# Altium PCB 56PCB原始.pcbdoc (part 1 of 3)
Units mm, origin at the board's own origin, x right, y up, seen from the top; angles counter-clockwise.
Board outline 101.98 x 99.56 mm, 2 copper layers (Top Layer, Bottom Layer); 160 components, 0 nets, 663 pads, 274 vias.
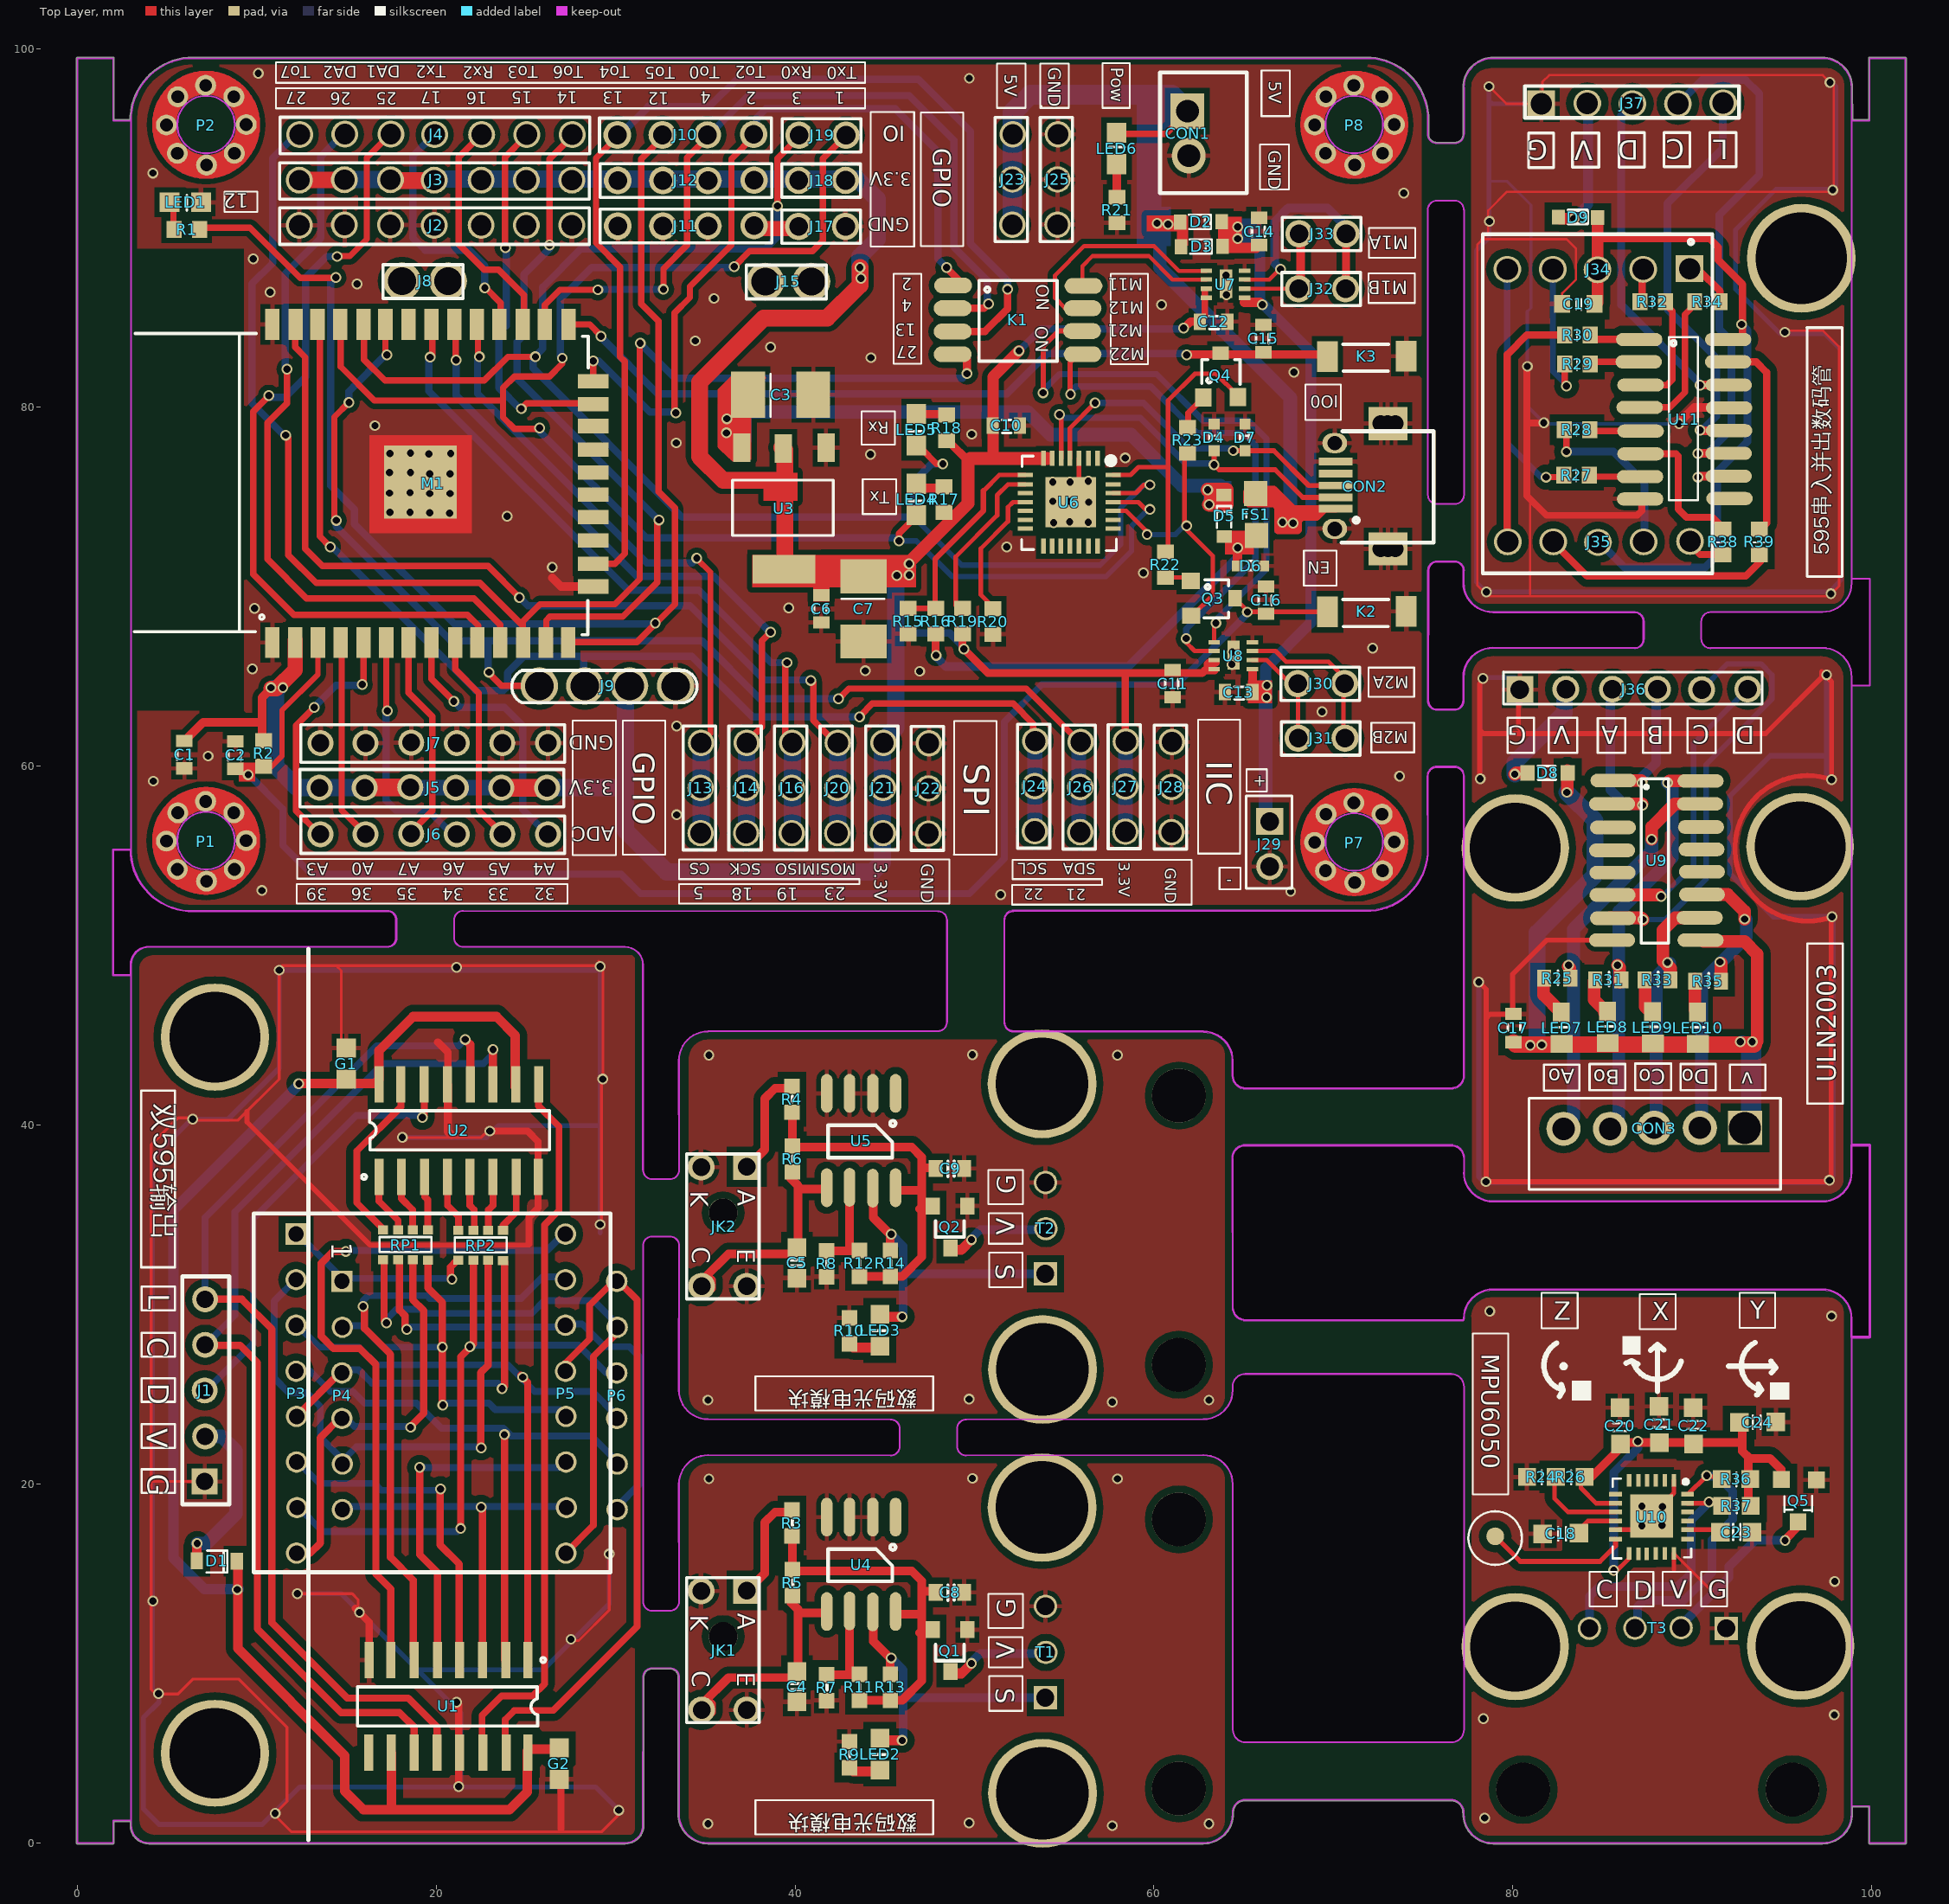
[diagram p0: Top Layer view]
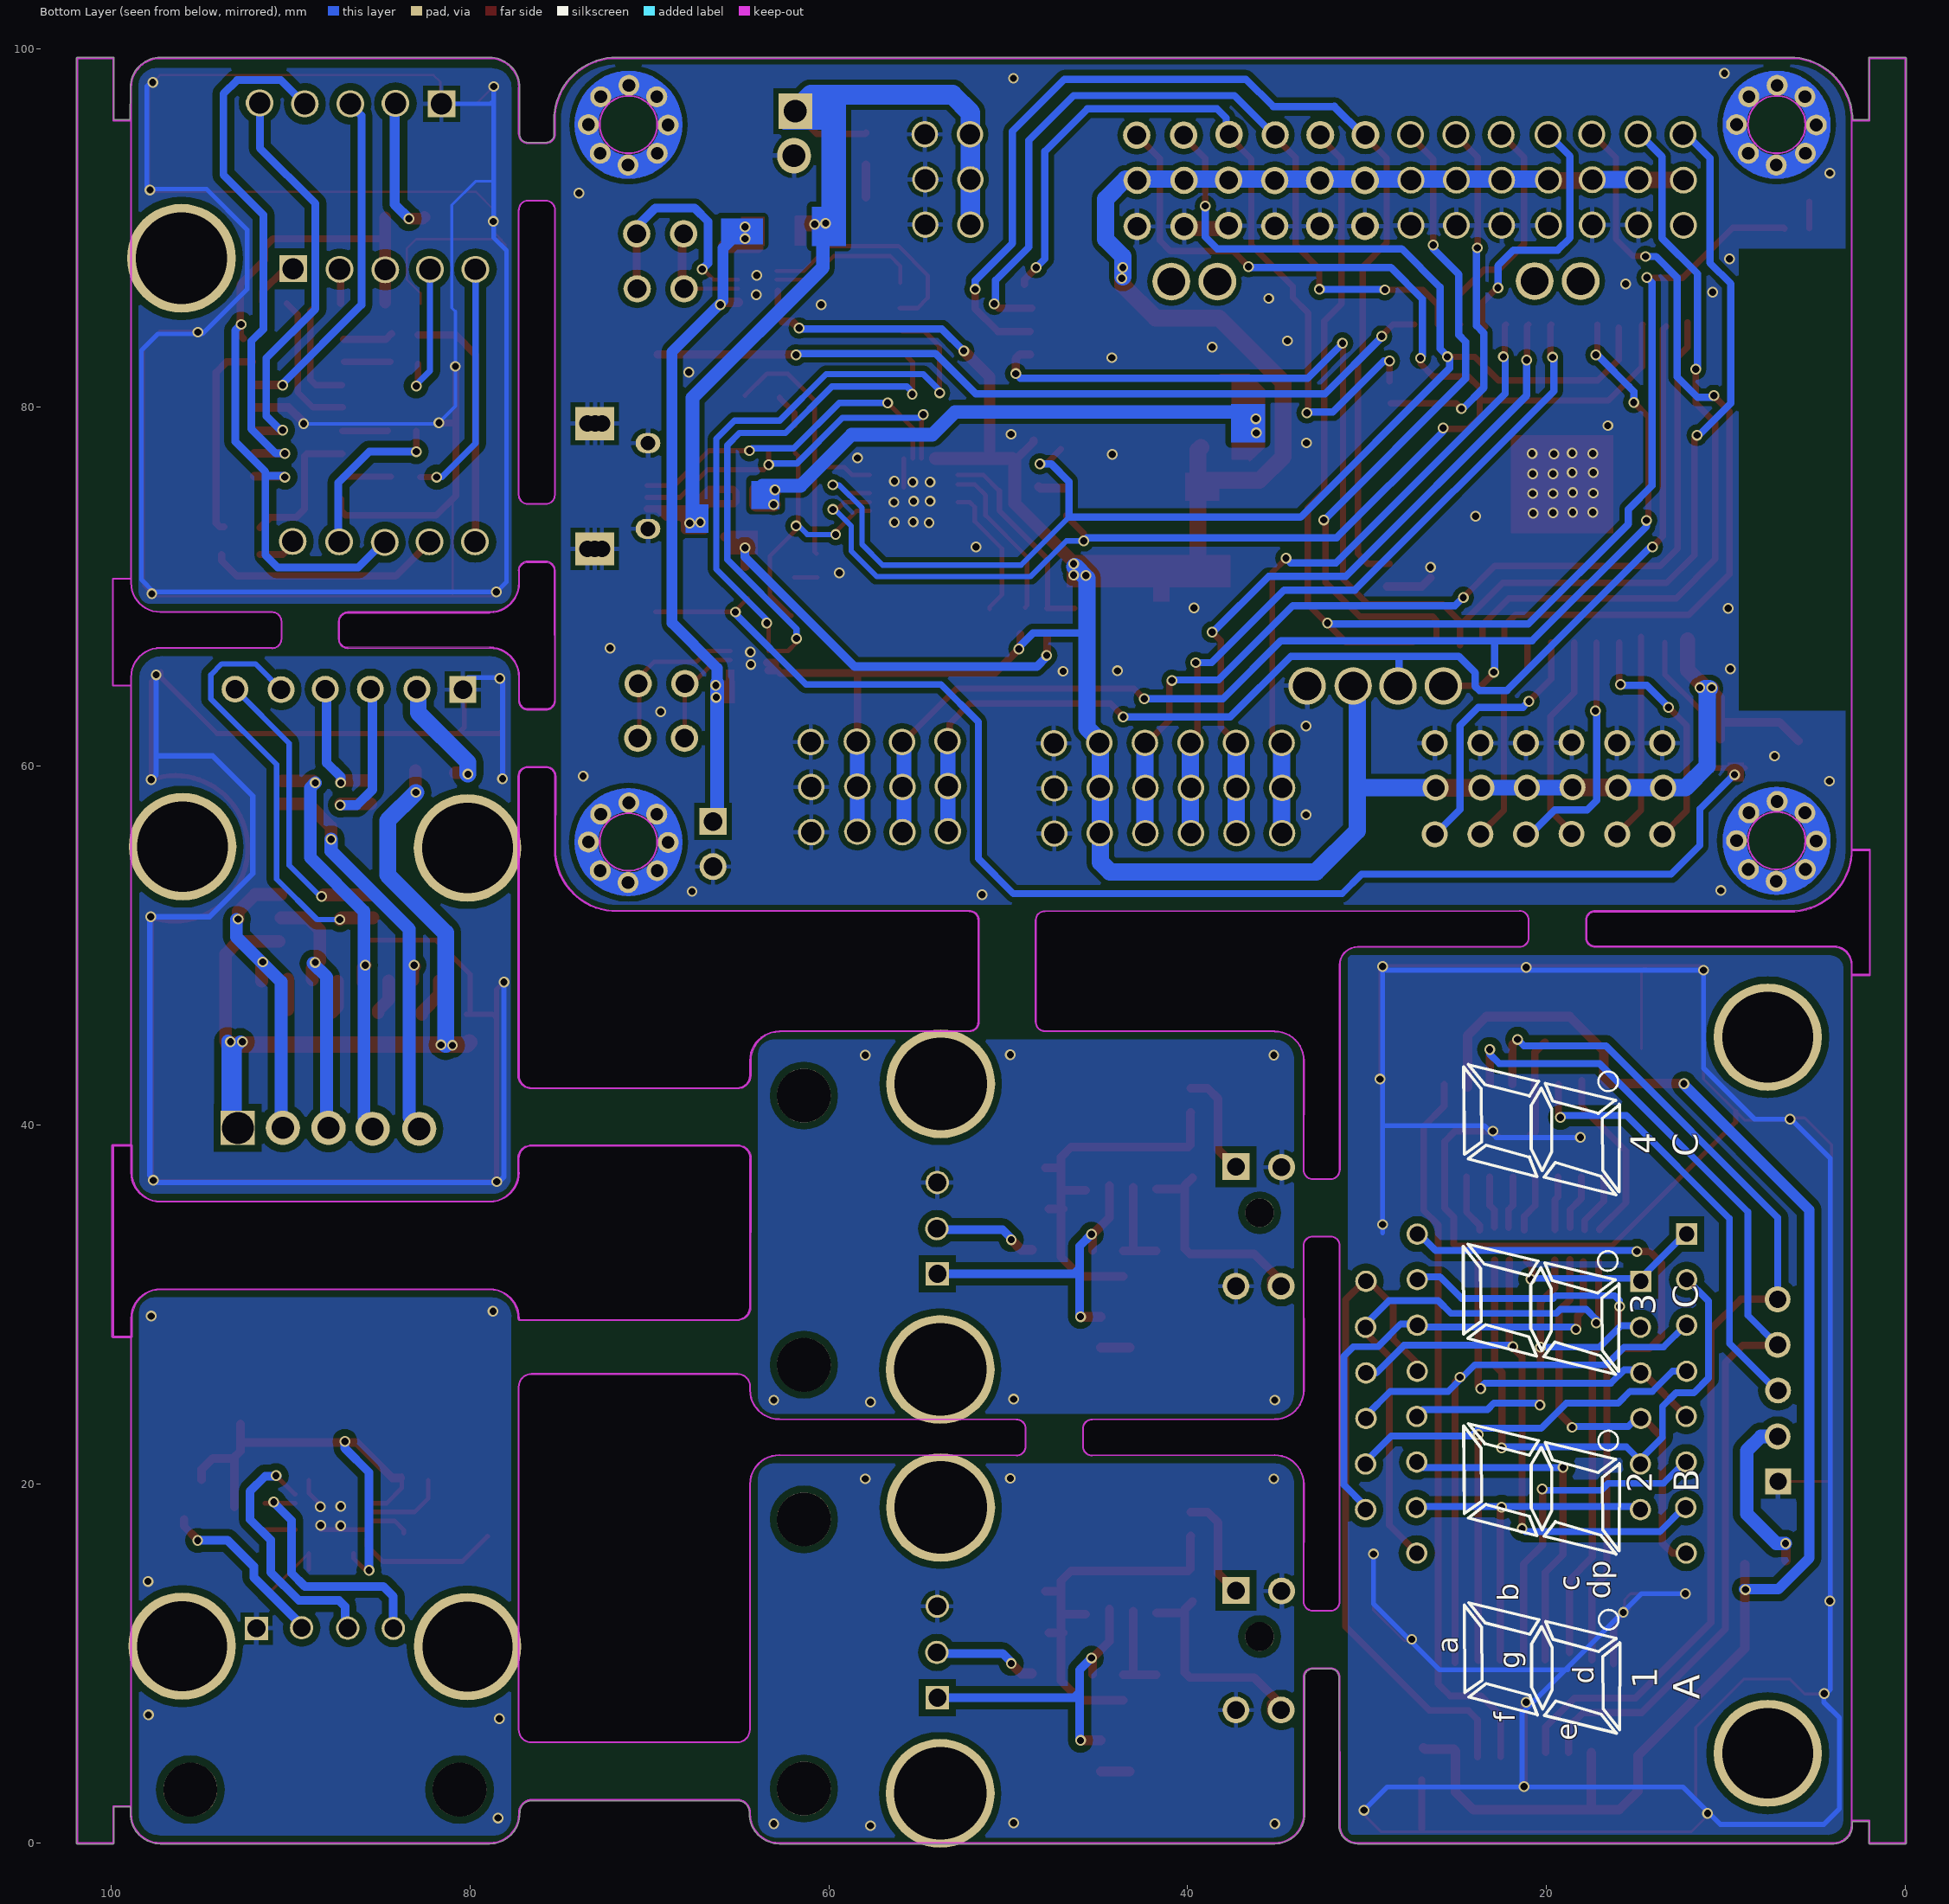
[diagram p1: Bottom Layer view, seen from below]

## Layer stack, top to bottom
Top Solder: solder mask 0.0102, Solder Resist, Dk 3.5
Top Layer: signal copper 0.0356
Dielectric 1: dielectric 0.32, FR-4, Dk 4.8
Bottom Layer: signal copper 0.0356
Bottom Solder: solder mask 0.0102, Solder Resist, Dk 3.5

## Board outline
3.989,-0.05 ccw(c3.991,0.991) 3.991,-0.05 ccw(c3.991,0) 3.991,-0.05 30.533,-0.05 30.534,-0.05 ccw(c30.534,0) 30.534,-0.05 ccw(c30.534,0.991) 31.465,0.525 ccw(c30.534,0.991) 31.575,0.99 ccw(c31.524,0.991) 31.575,0.991 31.58,9.24 ccw(c31.53,9.24) 31.58,9.24 cw(c32.038,9.24) 32.038,9.697 33.028,9.697 cw(c33.028,9.24) 33.486,9.24 cw(c33.028,9.24) 33.486,9.24 33.474,1.626 ccw(c33.524,1.626) 33.474,1.625 cw(c35.15,1.626) 33.474,1.626 33.474,1.625 ccw(c35.15,1.626) 35.15,-0.05 62.76,-0.05 ccw(c62.76,1.626) 64.436,1.625 ccw(c64.385,1.626) 64.436,1.626 cw(c62.76,1.626) 64.436,1.625 64.436,1.626 ccw(c64.385,1.626) 64.435,1.629 64.431,1.699 cw(c65.092,1.697) 65.092,2.358 76.547,2.358 cw(c76.547,1.697) 77.208,1.697 ccw(c77.258,1.697) 77.208,1.694 77.213,1.624 ccw(c78.889,1.626) 78.889,-0.05 97.253,-0.05 ccw(c97.253,0) 97.253,-0.05 ccw(c97.253,1.626) 98.929,1.626 98.929,2.007 99.828,2.007 99.828,0 ccw(c99.878,0) 99.878,-0.05 101.878,-0.05 ccw(c101.878,0) 101.929,0 101.929,99.46 ccw(c101.878,99.46) 101.878,99.51 99.878,99.51 ccw(c99.878,99.46) 99.828,99.46 99.828,96.04 98.93,96.04 98.929,97.834 ccw(c97.253,97.834) 97.253,99.51 78.889,99.51 ccw(c78.889,99.46) 78.888,99.51 ccw(c78.889,97.834) 77.213,97.834 ccw(c77.263,97.834) 77.224,97.803 77.224,95.25 ccw(c77.269,95.228) 77.218,95.228 cw(c76.761,95.228) 76.761,94.77 75.77,94.77 cw(c75.77,95.228) 75.312,95.227 75.313,96.285 ccw(c75.263,96.285) 75.313,96.285 ccw(c75.263,96.285) 75.313,96.288 ccw(c71.834,96.031) 72.092,99.51 ccw(c72.088,99.46) 72.088,99.51 6.176,99.51 ccw(c6.175,99.46) 6.171,99.51 ccw(c6.429,96.031) 2.951,96.299 ccw(c2.999,96.285) 2.949,96.285 2.949,96.04 2.05,96.04 2.05,99.46 ccw(c2,99.46) 2,99.51 0,99.51 ccw(c0,99.46) -0.05,99.46 -0.05,0 ccw(c0,0) 0,-0.05 2,-0.05 ccw(c2,0) 2.05,0 2.05,1.197 2.95,1.197 2.95,0.991 ccw(c3,0.991) 2.95,0.991 ccw(c3.991,0.991)
cut-out: 30.534,49.936 cw(c30.534,48.946) 31.524,48.946 31.526,37.51 31.529,37.51 ccw(c32.037,37.51) 32.037,37.002 33.027,37.002 ccw(c33.027,37.51) 33.535,37.51 33.533,37.51 33.524,43.605 cw(c35.15,43.605) 35.15,45.231 47.959,45.248 ccw(c47.959,45.756) 48.467,45.756 48.467,51.42 ccw(c47.959,51.42) 47.959,51.928 21.506,51.94 ccw(c21.506,51.432) 20.998,51.432 20.998,50.442 ccw(c21.506,50.442) 21.506,49.934 21.506,49.936
cut-out: 75.267,75.127 75.263,91.012 cw(c75.771,91.012) 75.771,91.52 76.762,91.52 cw(c76.762,91.012) 77.27,91.012 77.274,91.012 77.274,75.127 cw(c76.766,75.127) 76.766,74.619 75.775,74.619 cw(c75.775,75.127)
cut-out: 90.503,67.091 ccw(c91.011,67.091) 91.011,66.583 91.011,66.586 97.253,66.599 cw(c97.253,64.973) 98.878,64.973 98.878,64.494 99.9,64.494 99.9,70.463 98.878,70.463 98.878,70.224 cw(c97.253,70.224) 97.253,68.599 91.011,68.592 91.011,68.59 ccw(c91.011,68.082) 90.503,68.082
cut-out: 49.033,22.108 ccw(c49.541,22.108) 49.541,21.6 62.76,21.615 cw(c62.76,19.99) 64.385,19.99 64.397,6.319 64.398,6.319 ccw(c65.11,6.319) 65.11,5.608 76.565,5.608 ccw(c76.565,6.319) 77.276,6.319 77.276,25.428 ccw(c76.565,25.428) 76.565,26.139 65.092,26.139 ccw(c65.092,25.428) 64.381,25.428 64.385,25.428 64.385,25.241 cw(c62.76,25.241) 62.76,23.615 49.541,23.606 ccw(c49.541,23.098) 49.033,23.098
cut-out: 31.529,13.456 ccw(c32.037,13.456) 32.037,12.948 33.027,12.948 ccw(c33.027,13.456) 33.535,13.456 33.533,13.456 33.524,19.99 cw(c35.15,19.99) 35.15,21.615 45.325,21.601 45.325,21.598 ccw(c45.325,22.106) 45.833,22.106 45.833,23.097 ccw(c45.325,23.097) 45.325,23.605 45.325,23.607 35.15,23.615 cw(c35.15,25.241) 33.524,25.241 33.536,33.294 ccw(c33.028,33.294) 33.028,33.802 32.038,33.802 ccw(c32.038,33.294) 31.53,33.294 31.526,33.294
cut-out: 65.11,29.1 77.178,29.1 ccw(c77.178,29.235) 77.313,29.235 cw(c78.889,29.235) 78.889,30.811 88.071,30.811 97.253,30.811 cw(c97.253,29.235) 98.828,29.236 ccw(c98.878,29.235) 98.828,29.235 98.828,28.215 ccw(c98.878,28.215) 98.837,28.186 ccw(c98.894,28.215) 98.894,28.151 99.881,28.151 ccw(c99.881,28.215) 99.945,28.215 99.945,38.873 ccw(c99.881,38.873) 99.881,38.936 98.894,38.936 ccw(c98.894,38.873) 98.831,38.862 ccw(c98.881,38.859) 98.831,38.859 98.828,37.363 ccw(c98.878,37.363) 98.828,37.363 ccw(c97.253,37.363) 98.828,37.363 cw(c97.253,37.363) 97.253,35.788 cw(c97.253,37.363) 97.253,35.788 cw(c97.253,35.738) 97.253,35.788 78.889,35.788 cw(c78.889,37.363) 77.314,37.329 ccw(c77.277,37.363) 77.328,37.363 77.328,38.142 ccw(c76.554,38.142) 76.554,38.916 65.084,38.916 ccw(c65.084,38.154) 64.323,38.154 ccw(c64.373,38.154) 64.326,38.136 64.346,29.861 ccw(c64.397,29.861) 64.348,29.849 ccw(c65.11,29.861)
cut-out: 64.335,43.605 cw(c64.385,43.605) 64.335,43.606 cw(c62.76,43.605) 64.335,43.605 64.34,42.776 cw(c65.102,42.777) 64.34,42.777 64.34,42.776 ccw(c65.102,42.777) 65.102,42.015 76.557,42.015 ccw(c76.557,42.777) 77.319,42.777 ccw(c77.269,42.777) 77.319,42.777 77.315,59.449 ccw(c77.265,59.449) 77.315,59.456 ccw(c76.757,59.449) 76.757,60.008 75.766,60.008 ccw(c75.766,59.449) 75.208,59.449 ccw(c75.258,59.449) 75.209,59.437 75.213,55.113 cw(c71.834,55.365) 72.086,51.987 52.175,51.98 cw(c52.175,51.421) 52.175,51.98 ccw(c52.175,51.421) 51.617,51.421 51.617,45.757 ccw(c52.175,45.757) 52.159,45.199 ccw(c52.175,45.246) 52.175,45.196 62.76,45.18 ccw(c62.76,45.231) 62.76,45.18 ccw(c62.76,43.605) 62.76,45.18 cw(c62.76,43.605)
cut-out: 31.474,48.946 cw(c31.524,48.946) 31.474,48.946 cw(c31.524,48.946) 31.474,48.947 cw(c30.534,48.946)
cut-out: 31.474,48.946 cw(c31.524,48.946) 31.474,48.946 cw(c31.524,48.946) 31.474,48.947 cw(c30.534,48.946)
cut-out: 2.033,48.415 2.95,48.415 2.95,48.946 cw(c3,48.946) 2.95,48.947 cw(c3,48.946) 2.95,48.947 ccw(c3.991,48.946) 2.95,48.946 2.95,48.947 cw(c3.991,48.946) 3.06,49.411 cw(c3.991,48.946) 3.991,49.987 cw(c3.991,49.936) 3.991,49.987 17.29,49.987 cw(c17.29,49.936) 17.308,49.983 ccw(c17.29,50.441) 17.748,50.441 17.748,51.431 ccw(c17.29,51.431) 17.29,51.889 ccw(c17.29,51.431) 17.29,51.889 6.683,51.886 cw(c6.683,51.936) 6.683,51.886 cw(c6.683,51.936) 6.683,51.886 ccw(c6.683,51.936) 6.683,51.886 6.175,51.886 cw(c6.175,51.936) 6.171,51.886 cw(c6.429,55.365) 2.95,55.108 cw(c3,55.111) 2.95,55.111 2.95,55.315 2.033,55.315
cut-out: 75.307,63.665 ccw(c75.765,63.665) 75.765,63.208 76.755,63.208 ccw(c76.755,63.665) 77.213,63.665 ccw(c76.755,63.665) 77.213,63.665 77.213,64.973 cw(c77.263,64.973) 77.213,64.973 cw(c78.889,64.973) 78.888,66.649 cw(c78.889,64.973) 78.889,66.649 86.795,66.632 ccw(c86.795,67.09) 87.253,67.09 87.253,68.08 ccw(c86.795,68.08) 86.795,68.538 cw(c86.795,68.588) 86.795,68.538 78.889,68.548 cw(c78.889,68.599) 78.888,68.548 cw(c78.889,70.224) 77.213,70.224 ccw(c77.263,70.224) 77.213,70.224 77.213,71.016 ccw(c76.767,70.911) 76.767,71.369 75.777,71.369 ccw(c75.777,70.911) 75.319,70.911 cw(c75.269,70.911) 75.319,70.911

## Design rules (kind name [scope] priority, off if disabled: settings)
Clearance [All] p1: gap=0.254 ignorepadtopadclearanceinfootprint=FALSE except(0: Arc-Hole Track-Hole SMDPad-Hole THPad-Hole Via-Hole Fill-Hole Poly-Hole Region-Hole Text-Hole)
PolygonConnect [All] p1: connectstyle=Relief reliefconductorwidth=0.254 reliefentries=4 polygonreliefangle="90 Angle" airgapwidth=0.254
RoutingVias [All] p1: holewidth=0.711 width=1.27 viastyle="Through Hole" minholewidth=0.711 minwidth=1.27 maxholewidth=0.711 maxwidth=1.27
SolderMaskExpansion [All] p1: expansion=0.102 istentingtop=FALSE
Width [All] p1: maxlimit=0.254 minlimit=0.254 preferedwidth=0.254
30 further rules are at their usual default settings.

## Components (designator, comment, footprint, x,y, rotation, side; value= is the part's Value field where it differs from the comment)
C1 "104" COMPONENT_13 5.972,60.649 r90 top
C2 "104" COMPONENT_13 8.817,60.623 r90 top
C3 "100UF/10V" COMPONENT_17 39.195,80.715 r180 top
C4 "104" COMPONENT_4#1 40.103,8.712 r270 top
C5 "104" COMPONENT_4#1 40.103,32.328 r270 top
C6 "104" COMPONENT_13 41.456,68.777 r90 top
C7 "100UF/10V" COMPONENT_17 43.818,68.777 r90 top
C8 "105" COMPONENT_5#1 48.637,13.97 r90 top
C9 "105" COMPONENT_5#1 48.637,37.585 r90 top
C10 "104" COMPONENT_13 51.768,78.987 r180 top
C11 "104" COMPONENT_13 61.039,64.611 r90 top
C12 "104" COMPONENT_13 63.325,84.779 r180 top
C13 "104" COMPONENT_13 64.722,64.128 r180 top
C14 "104" COMPONENT_13 65.865,89.808 r90 top
C15 "104" COMPONENT_13 66.094,83.839 r90 top
C16 "104" COMPONENT_13 66.246,69.259 r90 top
C17 "104" COMPONENT_5#2 80.032,45.415 r0 top
C18 "104" COMPONENT_5#3 82.673,17.247 r90 top
C19 "104" COMPONENT_4#2 83.651,85.769 r0 top
C20 "104." COMPONENT_5#3 85.975,23.241 r0 top
C21 "104." COMPONENT_5#3 88.16,23.317 r180 top
C22 "103" COMPONENT_5#3 90.065,23.241 r180 top
C23 "2.2nF" COMPONENT_4#3 92.452,17.323 r180 top
C24 "105" COMPONENT_5#3 93.646,23.444 r270 top
CON1 "XH2.54MM*2P直针插座" COMPONENT_24 61.903,95.269 r90 top
CON2 "安卓尾插牛角5针USB插座" COMPONENT_25 71.656,75.609 r90 top
CON3 "XH2.54MM*5P直针插座" COMPONENT_7#1 87.88,39.827 r0 top
D1 "S4" COMPONENT_6#1 7.775,15.723 r0 top
D2 "S4" COMPONENT_21 62.614,90.341 r0 top
D3 "S4" COMPONENT_21 62.665,88.97 r0 top
D4 "NC" COMPONENT_22 63.35,78.327 r90 top
D5 "S4" COMPONENT_21 63.909,73.958 r90 top
D6 "NC" COMPONENT_22 65.382,71.164 r0 top
D7 "NC" COMPONENT_22 65.078,78.327 r90 top
D8 "S4" COMPONENT_2#1 81.937,59.639 r0 top
D9 "S4" COMPONENT_3#1 83.626,90.595 r0 top
FS1 "FS" COMPONENT_23 65.687,74.034 r90 top
G1 "104" COMPONENT_5#4 14.989,43.434 r180 top
G2 "104" COMPONENT_5#4 26.851,4.42 r180 top
J1 "2.54排针5P黑色" COMPONENT_1#1 7.115,25.222 r0 top
J2 "2.54排针13P黑色" COMPONENT_4#4 19.967,90.163 r90 top
J3 "2.54排针13P红色" COMPONENT_4#4 19.967,92.678 r90 top
J4 "2.54排针13P黄色" COMPONENT_4#4 19.993,95.218 r90 top
J5 "2.54排针6P红色" COMPONENT_1#2 19.84,58.82 r90 top
J6 "2.54排针6P蓝色" COMPONENT_1#2 19.891,56.229 r90 top
J7 "2.54排针6P黑色" COMPONENT_1#2 19.891,61.309 r90 top
J8 "2P圆孔排母DS18B20" COMPONENT_5#5 19.383,87.039 r90 top
J9 "4P圆孔排母DS18B20" COMPONENT_2#2 29.543,64.484 r90 top
J10 "NC" COMPONENT_6#2 33.886,95.193 r90 top
J11 "NC" COMPONENT_6#2 33.912,90.113 r90 top
J12 "NC" COMPONENT_6#2 33.912,92.653 r90 top
J13 "2.54排针3P白色" COMPONENT_3#2 34.75,58.794 r90 top
J14 "2.54排针3P绿色" COMPONENT_3#2 37.29,58.794 r90 top
J15 "2P圆孔排母DS18B20" COMPONENT_5#5 39.627,87.014 r90 top
J16 "2.54排针3P蓝色" COMPONENT_3#2 39.83,58.794 r90 top
J17 "NC" COMPONENT_7#2 41.506,90.087 r90 top
J18 "NC" COMPONENT_7#2 41.506,92.653 r90 top
J19 "NC" COMPONENT_7#2 41.532,95.167 r90 top
J20 "2.54排针3P黄色" COMPONENT_3#2 42.37,58.794 r90 top
J21 "2.54排针3P红色" COMPONENT_3#2 44.91,58.794 r90 top
J22 "2.54排针3P黑色" COMPONENT_3#2 47.45,58.769 r90 top
J23 "2.54排针3P红色" COMPONENT_3#2 52.124,92.703 r90 top
J24 "2.54排针3P蓝色" COMPONENT_3#2 53.368,58.896 r90 top
J25 "2.54排针3P黑色" COMPONENT_3#2 54.638,92.703 r90 top
J26 "2.54排针3P黄色" COMPONENT_3#2 55.908,58.845 r90 top
J27 "2.54排针3P红色" COMPONENT_3#2 58.423,58.871 r90 top
J28 "2.54排针3P黑色" COMPONENT_3#2 60.988,58.845 r90 top
J29 "NC" COMPONENT_8 66.449,55.67 r90 top
J30 "2.54排针2P蓝色" COMPONENT_7#2 69.319,64.611 r90 top
J31 "2.54排针2P黄色" COMPONENT_7#2 69.345,61.563 r90 top
J32 "2.54排针2P黄色" COMPONENT_7#2 69.37,86.607 r90 top
J33 "2.54排针2P蓝色" COMPONENT_7#2 69.396,89.681 r90 top
J34 "5P圆孔排母DS18B20" COMPONENT_2#3 84.769,87.7 r0 top
J35 "5P圆孔排母DS18B20" COMPONENT_2#4 84.794,72.51 r0 top
J36 "2.54排针6P黑色" COMPONENT_1#3 86.737,64.287 r0 top
J37 "2.54排针5P黑色" COMPONENT_1#4 86.648,96.945 r0 top
JK1 "ITR20403红外线对射式光电开关" COMPONENT_1#5 36.039,10.744 r90 top
JK2 "ITR20403红外线对射式光电开关" COMPONENT_1#5 36.039,34.36 r90 top
K1 "贴片拨码开关（4位，1.25mm脚间距）" COMPONENT_18 52.428,84.88 r90 top
K2 "3*4*2MM按键按钮 2脚" COMPONENT_19 71.859,68.624 r90 top
K3 "3*4*2MM按键按钮 2脚" COMPONENT_19 71.859,82.848 r90 top
LED1 "LED蓝" COMPONENT_11 6.023,91.433 r90 top
LED2 "LED蓝" COMPONENT_2#5 44.726,4.953 r90 top
LED3 "LED蓝" COMPONENT_2#5 44.726,28.568 r90 top
LED4 "LED蓝" COMPONENT_11 46.764,74.873 r0 top
LED5 "LED蓝" COMPONENT_11 46.764,78.759 r0 top
LED6 "LED蓝" COMPONENT_11 57.915,94.431 r180 top
LED7 "LED蓝" COMPONENT_6#3 82.724,45.441 r0 top
LED8 "LED蓝" COMPONENT_6#3 85.289,45.491 r0 top
LED9 "LED蓝" COMPONENT_6#3 87.804,45.466 r0 top
LED10 "LED蓝" COMPONENT_6#3 90.319,45.441 r0 top
M1 "ESP32-WROOM-32DC （WIFI&蓝牙模块）" COMPONENT_9 20.043,75.762 r90 top
P1 "NC" COMPONENT_26 7.191,55.823 r90 top
P2 "NC" COMPONENT_26 7.191,95.726 r90 top
P3 "8P圆孔排母DS18B20" COMPONENT_2#6 12.22,25.044 r0 top
P4 "6P圆孔排母DS18B20" COMPONENT_3#3 14.76,24.943 r0 top
P5 "8P圆孔排母DS18B20" COMPONENT_2#7 27.232,25.044 r0 top
P6 "6P圆孔排母DS18B20" COMPONENT_3#4 30.076,24.943 r0 top
P7 "NC" COMPONENT_26 71.174,55.746 r90 top
P8 "NC" COMPONENT_26 71.174,95.726 r90 top
Q1 "662K" COMPONENT_6#4 48.637,10.719 r90 top
Q2 "662K" COMPONENT_6#4 48.637,34.334 r90 top
Q3 "Y1" COMPONENT_20 63.223,69.361 r90 top
Q4 "Y1" COMPONENT_20 63.706,81.731 r180 top
Q5 "662K" COMPONENT_3#5 95.932,19.075 r180 top
R1 "510R" COMPONENT_10 6.099,89.909 r90 top
R2 "100K" COMPONENT_10 10.391,60.725 r180 top
R3 "100R" COMPONENT_3#6 39.823,17.831 r90 top
R4 "100R" COMPONENT_3#6 39.823,41.446 r90 top
R5 "10K" COMPONENT_3#6 39.849,14.503 r90 top
R6 "10K" COMPONENT_3#6 39.849,38.119 r90 top
R7 "10K" COMPONENT_3#6 41.754,8.661 r90 top
R8 "10K" COMPONENT_3#6 41.754,32.277 r90 top
R9 "150R" COMPONENT_3#6 43.024,4.928 r90 top
R10 "150R" COMPONENT_3#6 43.024,28.543 r90 top
R11 "10K" COMPONENT_3#6 43.583,8.687 r90 top
R12 "10K" COMPONENT_3#6 43.583,32.302 r90 top
R13 "10K" COMPONENT_3#6 45.31,8.687 r90 top
R14 "10K" COMPONENT_3#6 45.31,32.302 r90 top
R15 "47K5" COMPONENT_10 46.307,68.091 r180 top
R16 "22K1" COMPONENT_10 47.831,68.091 r180 top
R17 "510R" COMPONENT_10 48.288,74.873 r180 top
R18 "510R" COMPONENT_10 48.441,78.86 r180 top
R19 "2K" COMPONENT_10 49.33,68.091 r180 top
R20 "10K" COMPONENT_10 51.031,68.065 r180 top
R21 "1K" COMPONENT_10 57.94,91.002 r180 top
R22 "10K" COMPONENT_10 60.633,71.24 r180 top
R23 "10K" COMPONENT_10 61.877,78.175 r180 top
R24 "4K7" COMPONENT_6#5 81.581,20.396 r180 top
R25 "1K" COMPONENT_4#5 82.47,48.184 r0 top
R26 "NC" COMPONENT_6#5 83.207,20.396 r180 top
R27 "1K" COMPONENT_5#6 83.55,76.219 r0 top
R28 "1K" COMPONENT_5#6 83.575,78.759 r0 top
R29 "1K" COMPONENT_5#6 83.6,82.416 r0 top
R30 "1K" COMPONENT_5#6 83.6,84.042 r0 top
R31 "1K" COMPONENT_4#5 85.315,48.108 r0 top
R32 "1K" COMPONENT_5#6 87.791,85.896 r0 top
R33 "1K" COMPONENT_4#5 88.058,48.108 r0 top
R34 "1K" COMPONENT_5#6 90.839,85.896 r0 top
R35 "1K" COMPONENT_4#5 90.877,48.031 r0 top
R36 "4K7" COMPONENT_6#5 92.427,20.295 r180 top
R37 "4K7" COMPONENT_6#5 92.452,18.796 r180 top
R38 "1K" COMPONENT_5#6 91.703,72.51 r90 top
R39 "1K" COMPONENT_5#6 93.735,72.51 r90 top
RP1 "220R" COMPONENT_7#3 18.291,33.325 r0 top
RP2 "220R" COMPONENT_7#3 22.482,33.299 r0 top
T1 "弯针连接器KF2510-3P白色" 21#1 53.946,8.103 r0 top
T2 "弯针连接器KF2510-3P白色" 21#1 53.946,31.718 r0 top
T3 "弯针连接器KF2510-4P白色" 21#2 91.893,11.966 r90 top
U1 "74FC595D" COMPONENT_4#6 20.678,7.62 r180 top
U2 "74FC595D" COMPONENT_4#6 21.263,39.7 r0 top
U3 "AMS1117-3.3V" COMPONENT_14 39.373,74.365 r90 top
U4 "LM358" COMPONENT_7#4 43.684,15.519 r90 top
U5 "LM358" COMPONENT_7#4 43.684,39.135 r90 top
U6 "CP2102-GMR 贴片QFN-28" COMPONENT_15 55.273,74.72 r90 top
U7 "DRV8837DSGR" COMPONENT_16 63.985,86.861 r90 top
U8 "DRV8837DSGR" COMPONENT_16 64.417,66.16 r90 top
U9 "ULN2003A" COMPONENT_3#7 88.033,54.762 r0 top
U10 "MPU-6050" COMPONENT_2#8 87.728,18.161 r180 top
U11 "74FC595D" COMPONENT_6#6 89.544,79.343 r0 top

## Footprints (in the part's own frame and the unit in brackets; to place one, negate y for a bottom-side part, rotate by r counter-clockwise, add the part's x,y. Pads: shape width x height; smd on the part's side, far side on the other; paste and mask are expansions set on the pad)
21#1 [mm]
  rect 1.3x1.3 hole 1: 1(0,0)
  round 1.3 hole 1: 2(0.031,2.519) 3(0.01,5.09)
21#2 [mm]
  rect 1.3x1.3 hole 1: 1(0,0)
  round 1.3 hole 1: 2(0.031,2.519) 3(0.01,5.09) 4(0,7.63)
COMPONENT_1#1 [mil]
  rect 56.84x56.84 hole 38: 1(-0.5,-200)
  round 56.84 hole 38: 2(0.5,-101) 3(-0.5,0) 4(0.5,100) 5(0.5,200)
  silkscreen extent -50,-250 54,250
COMPONENT_1#2 [mil]
  round 57.11 hole 39: 1(-0.5,-249.5) 2(-0.5,-149.5) 3(-0.5,-49.5) 4(0.5,50.5) 5(-0.5,150.5) 6(-0.5,249.5)
  silkscreen extent -43,-286 40,292
COMPONENT_1#3 [mil]
  rect 59x59 hole 41: 1(-250,-0.5)
  round 59 hole 41: 2(-149,0.5) 3(-47,0.5) 4(52,0.5) 5(149,-0.5) 6(250,0.5)
  silkscreen extent -286,-32 282,38
COMPONENT_1#4 [mil]
  rect 60.84x58.84 hole 47: 1(-199.5,-1)
  oval 60.84x58.84 hole 47: 2(-98.5,0) 3(0.5,-1) 4(100.5,-1) 5(199.5,1)
  silkscreen extent -236,-32 234,38
COMPONENT_1#5 [mil]
  rect 58.84x58.84 hole 39: 1(131,-50)
  round 58.84 hole 39: 2(130,50) 3(-131,49) 4(-131,-50)
  round 63 hole 63: 5(30,2)
  silkscreen extent -159,-77 159,82
COMPONENT_2#1 [mil]
  rect 31x34 smd: 1(-44,0) 2(44,0)
  silkscreen extent -22,-15 18,15
COMPONENT_2#2 [mil]
  round 82.11 hole 63: 1(0,149.5) 2(0,49.5) 3(0,-48.5) 4(0,-149.5)
  silkscreen extent -37,-197 34,210
COMPONENT_2#3 [mil]
  rect 60.84x58.84 hole 47: 1(200,1)
  oval 60.84x58.84 hole 47: 2(98,0) 3(-2,-1) 4(-100,0) 5(-200,0)
COMPONENT_2#4 [mil]
  oval 60.84x58.84 hole 47: 1(200,1) 2(98,0) 3(-2,-1) 4(-100,0) 5(-200,0)
COMPONENT_2#5 [mil]
  rect 41x41 smd: 1(35,0) 2(-35,0)
  silkscreen extent -1,-13 -1,16
COMPONENT_2#6 [mil]
  rect 46.84x46.84 hole 34: 1(-1,350)
  round 46.84 hole 34: 2(-1,250) 3(-1,150) 4(-1,49) 5(0,-50) 6(0,-150) 7(1,-250) 8(0,-350)
COMPONENT_2#7 [mil]
  round 46.84 hole 34: 1(-1,350) 2(-1,250) 3(-1,150) 4(-1,49) 5(0,-50) 6(0,-150) 7(1,-250) 8(0,-350)
COMPONENT_2#8 [mil]
  rect 9.84x27.84 smd: 1(-49,-80.5) 2(-29,-80.5) 3(-9,-80.5) 4(10,-80.5) 5(29,-80.5) 6(49,-80.5) 13(49,79.5) 14(29,80.5) 15(11,80.5) 16(-9,79.5) 17(-29,79.5) 18(-49,79.5)
  rect 27.84x9.84 smd: 7(79,-50.5) 8(79,-30.5) 9(79,-11.5) 10(79,8.5) 11(79,27.5) 12(79,48.5) 19(-79,48.5) 20(-79,27.5) 21(-79,8.5) 22(-79,-11.5) 23(-79,-30.5) 24(-79,-50.5)
  rect 94.49x94.49 smd: 25(0,-2.5)
  silkscreen extent -87,-84 85,91
COMPONENT_3#1 [mil]
  rect 28.84x32.84 smd: 1(-43,0.5) 2(43,-0.5)
  silkscreen extent -21,-14 23,16
COMPONENT_3#2 [mil]
  round 58 hole 45: 1(-99,0.5) 2(0,0.5) 3(99,-0.5)
  silkscreen extent -136,-33 136,39
COMPONENT_3#3 [mil]
  rect 46.84x46.84 hole 34: 1(-0.5,250.5)
  round 46.84 hole 34: 2(0.5,149.5) 3(-0.5,49.5) 4(-0.5,-50.5) 5(0.5,-150.5) 6(0.5,-250.5)
COMPONENT_3#4 [mil]
  round 46.84 hole 34: 1(-0.5,250.5) 2(0.5,149.5) 3(-0.5,49.5) 4(-0.5,-50.5) 5(0.5,-150.5) 6(0.5,-250.5)
COMPONENT_3#5 [mil]
  rect 36.84x36.84 smd: 1(-38.5,-45.5) 2(38.5,-46.5) 3(1.5,46.5)
  silkscreen extent -30,-11 32,25
COMPONENT_3#6 [mil]
  rect 34x34 smd: 1(-28.5,0) 2(28.5,0)
  silkscreen extent -6,-1 6,-1
COMPONENT_3#7 [mil]
  oval 101x30 smd: 1(-95.5,175) 2(-98.5,124) 3(-96.5,72) 4(-98.5,22) 5(-97.5,-27) 6(-97.5,-76) 7(-96.5,-127) 8(-98.5,-175) 9(95.5,-175) 10(93.5,-126) 11(98.5,-75) 12(98.5,-25) 13(97.5,24) 14(96.5,73) 15(94.5,124) 16(95.5,174)
  silkscreen extent -34,-182 26,179
COMPONENT_4#1 [mil]
  rect 41x41 smd: 1(33.5,0) 2(-33.5,0)
  silkscreen extent -6,-13 7,12
COMPONENT_4#2 [mil]
  rect 34.84x38.84 smd: 1(-35.5,0) 2(35.5,0)
  silkscreen extent -4,-14 6,12
COMPONENT_4#3 [mil]
  rect 40.84x40.84 smd: 4(-34.5,0) 5(34.5,0)
  silkscreen extent -9,-18 7,17
COMPONENT_4#4 [mil]
  round 59 hole 45: 1(-0.5,299) 2(0.5,200) 3(0.5,99) 4(-0.5,3) 5(-0.5,-100) 6(-0.5,-199) 7(-0.5,-299)
  silkscreen extent -43,-337 38,342
COMPONENT_4#5 [mil]
  rect 31x37 smd: 1(-28.5,0) 2(28.5,0)
  silkscreen extent 2,-14 2,17
COMPONENT_4#6 [mil]
  rect 19.84x79.84 smd: 1(-175,-101.5) 2(-126,-101.5) 3(-75,-101.5) 4(-25,-101.5) 5(24,-101.5) 6(75,-101.5) 7(126,-101.5) 8(174,-101.5) 9(175,101.5) 10(125,101.5) 11(75,101.5) 12(25,101.5) 13(-25,101.5) 14(-76,101.5) 15(-127,101.5) 16(-175,101.5)
  silkscreen extent -213,-107 199,44
COMPONENT_5#1 [mil]
  rect 37x31 smd: 1(0,31) 2(0,-31)
  silkscreen extent -18,-9 16,5
COMPONENT_5#2 [mil]
  rect 36x27 smd: 1(0,31) 2(0,-31)
  silkscreen extent -12,-6 15,8
COMPONENT_5#3 [mil]
  rect 40.84x40.84 smd: 6(-0.5,40) 7(0.5,-40)
  silkscreen extent -15,-11 14,6
COMPONENT_5#4 [mil]
  rect 41.84x41.84 smd: 1(0,34.5) 2(0,-34.5)
COMPONENT_5#5 [mil]
  round 83 hole 61: 1(0,50.5) 2(0,-50.5)
  silkscreen extent -38,-84 36,92
COMPONENT_5#6 [mil]
  rect 32.84x36.84 smd: 3(-28,0) 4(28,0)
  silkscreen extent -1,-13 -1,13
COMPONENT_6#1 [mil]
  rect 26.84x36.84 smd: 1(-44,0.5) 2(44,-0.5)
  silkscreen extent -22,-26 23,22
COMPONENT_6#2 [mil]
  round 61 hole 41: 1(-0.25,149.25) 2(-0.25,50.25)
  round 60 hole 41: 3(-0.25,-48.75) 4(0.75,-149.75)
  silkscreen extent -37,-189 37,188
COMPONENT_6#3 [mil]
  rect 37x43 smd: 1(-1,33.5)
  rect 48x39 smd: 2(0,-35.5)
  silkscreen extent -15,0 13,0
COMPONENT_6#4 [mil]
  rect 37x31 smd: 1(46,-38) 2(46,38) 3(-46,-1)
  silkscreen extent -22,-31 13,32
COMPONENT_6#5 [mil]
  rect 38.84x38.84 smd: 8(-31.5,0) 9(31.5,0)
  silkscreen extent -2,-14 -1,16
COMPONENT_6#6 [mil]
  oval 101.84x28.84 smd: 1(-98.5,175) 2(-99.5,126) 3(-95.5,75) 4(-97.5,26) 5(-95.5,-26) 6(-95.5,-76) 7(-96.5,-126) 8(-96.5,-175) 9(99.5,-174) 10(97.5,-125) 11(97.5,-75) 12(98.5,-25) 13(98.5,25) 14(97.5,75) 15(96.5,126) 16(96.5,175)
  silkscreen extent -34,-178 30,180
COMPONENT_7#1 [mil]
  rect 75x75 hole 70: 1(199,1)
  round 75 hole 49: 2(100,1) 3(0,1) 4(-97,-1) 5(-199,-1)
  silkscreen extent -275,-134 277,66
COMPONENT_7#2 [mil]
  round 60 hole 41: 1(0,51.5) 2(0,-51.5)
  silkscreen extent -37,-84 36,88
COMPONENT_7#3 [mil]
  rect 21.84x19.84 smd: 1(-49,33.5) 2(-49,-32.5) 3(-16,33.5) 4(-16,-32.5) 5(16,33.5) 6(16,-32.5) 7(49,33.5) 8(49,-33.5)
  silkscreen extent -57,-16 57,18
COMPONENT_7#4 [mil]
  oval 85x25 smd: 1(104,-75.5) 2(104,-25.5) 3(104,25.5) 4(104,75.5) 5(-103,75.5) 6(-102,25.5) 7(-104,-25.5) 8(-103,-75.5)
  silkscreen extent -37,-76 44,72
COMPONENT_8 [mil]
  rect 59x59 hole 41: 1(49.5,0)
  round 59 hole 41: 2(-49.5,0)
  silkscreen extent -98,-49 106,52
COMPONENT_9 [mil]
  rect 68x31.5 smd: 1(-349,361.13) 2(-349,311.13) 3(-349,261.13) 4(-349,211.13) 5(-349,161.13) 6(-349,111.13) 7(-349,62.13) 8(-349,12.13) 9(-349,-39.87) 10(-349,-88.87) 11(-349,-138.87) 12(-349,-188.87) 13(-349,-238.87) 14(-349,-287.87) 25(349,-288.87) 26(349,-236.87) 27(349,-187.87) 28(349,-136.87) 29(349,-87.87) 30(349,-37.87) 31(349,12.13) 32(349,62.13) 33(349,113.13) 34(349,161.13) 35(349,212.13) 36(349,262.13) 37(349,310.13) 38(349,361.13)
  rect 31.5x68 smd: 15(-226,-342.87) 16(-176,-342.87) 17(-125,-342.87) 18(-74,-342.87) 19(-24,-342.87) 20(24,-342.87) 21(74,-342.87) 22(126,-342.87) 23(174,-342.87) 24(224,-342.87)
  rect 161x159 smd: 39(3,36.13)
  silkscreen extent -332,-332 329,664
COMPONENT_10 [mil]
  rect 37x33 smd: 1(0,28) 2(0,-28)
COMPONENT_11 [mil]
  rect 43x44 smd: 1(0,34.5) 2(0,-34.5)
  silkscreen extent -18,-3 16,-3
COMPONENT_13 [mil]
  rect 27x36 smd: 1(30,0) 2(-30,0)
  silkscreen extent -11,-12 10,16
COMPONENT_14 [mil]
  rect 62x38 smd: 1(133.75,-92.5) 2(131.75,1.5) 3(133.75,92.5)
  rect 63x138 smd: 4(-133.25,-0.5)
  silkscreen extent -59,-108 63,112
COMPONENT_15 [mil]
  rect 33x10 smd: 1(96,-62.5) 2(96,-42.5) 3(96,-21.5) 4(96,-1.5) 5(96,17.5) 6(96,37.5) 7(96,56.5) 15(-96,56.5) 16(-96,37.5) 17(-96,18.5) 18(-96,-1.5) 19(-96,-21.5) 20(-96,-42.5) 21(-96,-62.5)
  rect 10x33 smd: 8(60,96.5) 9(39,96.5) 10(20,96.5) 11(0,96.5) 12(-19,96.5) 13(-39,96.5) 14(-58,96.5) 22(-58,-96.5) 23(-39,-96.5) 24(-19,-96.5) 25(0,-96.5) 26(20,-96.5) 27(39,-96.5) 28(60,-96.5)
  rect 110.24x110.24 smd: 29(0,-3.5)
  silkscreen extent -106,-104 101,104
COMPONENT_16 [mil]
  rect 9.84x25 smd: 1(29.5,42) 2(10.5,42) 3(-9.5,42) 4(-29.5,42) 5(-29.5,-42) 6(-9.5,-42) 7(10.5,-42) 8(29.5,-42)
  rect 62.84x27 smd: 9(1.5,-1)
COMPONENT_17 [mil]
  rect 74.84x101 smd: 1(71.25,0)
  rect 73.84x101 smd: 2(-71.75,0)
  silkscreen extent 22,-45 22,48
COMPONENT_18 [mil]
  oval 34.84x83 smd: 1(75.5,142.5) 2(25.5,143.5) 3(-25.5,143.5) 4(-75.5,143.5) 5(-75.5,-141.5) 6(-24.5,-140.5) 7(25.5,-141.5) 8(74.5,-143.5)
  silkscreen extent -91,-86 87,86
COMPONENT_19 [mil]
  rect 66.84x46 smd: 1(-0.5,86.5) 2(0.5,-86.5)
  silkscreen extent -32,-48 27,52
COMPONENT_20 [mil]
  rect 35.84x40 smd: 1(38,46) 2(-38,45)
  rect 35.84x30 smd: 3(0,-51)
  silkscreen extent -43,-37 41,17
COMPONENT_21 [mil]
  rect 27.84x33 smd: 1(-45.5,-0.5) 2(45.5,0.5)
  silkscreen extent -26,-16 22,16
COMPONENT_22 [mil]
  rect 23.84x24 smd: 1(-29,0) 2(29,0)
  silkscreen extent -9,-9 10,11
COMPONENT_23 [mil]
  rect 54.84x51 smd: 3(46,1) 4(-46,-1)
  silkscreen extent -8,-19 5,21
COMPONENT_24 [mil]
  rect 77.84x74 hole 50: 1(49,1.5)
  oval 77.84x74 hole 50: 2(-49,-1.5)
  silkscreen extent -131,-128 134,62
COMPONENT_25 [mil]
  rect 16.84x74 smd: 1(-49.5,60.25) 2(-24.5,60.25) 3(1.5,60.25) 4(27.5,60.25) 5(54.5,60.25)
  oval 43.84x54 hole 32: 6(-93.5,62.25) 7(94.5,62.25)
  rect 72.84x53 hole 36: 8(137.5,-38.75) 9(137.5,-70.75) 10(137.5,-53.75) 11(-137.5,-38.75) 12(-137.5,-70.75) 13(-137.5,-54.75)
  silkscreen extent -124,-155 121,47
COMPONENT_26 [mil]
  round 45.84 hole 28: 1(-61.5,63.5) 2(0.5,87.5) 3(62.5,62.5) 4(87.5,1.5) 5(62.5,-60.5) 6(1.5,-87.5) 7(-61.5,-61.5) 8(-87.5,-0.5)
  Top Layer circle w51.94: c1.08,0.5 r92.42
  Bottom Layer circle w51.94: c1.08,0.5 r92.42
  Keep-Out Layer circle w3.94: c1.37,0.5 r63.13

## Free pads (board coordinates)
  round 6.071 hole 5.156: 1(53.768,18.694) 1(53.768,42.31) 2(53.793,2.769) 2(53.793,26.384)
  round 6.067 hole 5.105: 1(96.072,88.309)
  round 5.994 hole 5.055: 6(80.133,55.448) 7(96.008,55.524)
  oval 6.016x5.965 hole 5.055: 9(7.674,44.907) 10(7.674,5.004)
  round 0.987 smd: 10(79.016,17.094)
  round 5.99 hole 5.004: 11(96.034,10.973) 12(80.133,10.947)
  round 3 hole 3 mask+0.102: 13(61.385,3.035) 13(61.385,26.651) 13(95.575,2.975) 14(61.385,18.035) 14(61.385,41.651) 14(80.575,2.975)

## Via types
v1: diameter 0.6, hole 0.4, Top Layer to Bottom Layer, tented both sides, 274 vias

## Nets (pads, with @x,y where several pads share a name; then routed paths per layer and width w, separated by ;. In a path a pad name is that pad's centre, name@x,y a point inside that pad or via, vN(x,y) a via of type N, cw(c..) or ccw(c..) an arc to the next point about the centre after c; other vN are vias at no path point)
pads on no net: C1.1 C1.2 C2.1 C2.2 C3.1 C3.2 C4.1 C4.2 C5.1 C5.2 C6.1 C6.2 C7.1 C7.2 C8.1 C8.2 C9.1 C9.2 C10.1 C10.2 C11.1 C11.2 C12.1 C12.2 C13.1 C13.2 C14.1 C14.2 C15.1 C15.2 C16.1 C16.2 C17.1 C17.2 C18.6 C18.7 C19.1 C19.2 C20.6 C20.7 C21.6 C21.7 C22.6 C22.7 C23.4 C23.5 C24.6 C24.7 CON1.1 CON1.2 CON2.1 CON2.2 CON2.3 CON2.4 CON2.5 CON2.6 CON2.7 CON2.8 CON2.9 CON2.10 CON2.11 CON2.12 CON2.13 CON3.1 CON3.2 CON3.3 CON3.4 CON3.5 D1.1 D1.2 D2.1 D2.2 D3.1 D3.2 D4.1 D4.2 D5.1 D5.2 D6.1 D6.2 D7.1 D7.2 D8.1 D8.2 D9.1 D9.2 FS1.3 FS1.4 G1.1 G1.2 G2.1 G2.2 J1.1 J1.2 J1.3 J1.4 J1.5 J2.1 J2.2 J2.3 J2.4 J2.5 J2.6 J2.7 J3.1 J3.2 J3.3 J3.4 J3.5 J3.6 J3.7 J4.1 J4.2 J4.3 J4.4 J4.5 J4.6 J4.7 J5.1 J5.2 J5.3 J5.4 J5.5 J5.6 J6.1 J6.2 J6.3 J6.4 J6.5 J6.6 J7.1 J7.2 J7.3 J7.4 J7.5 J7.6 J8.1 J8.2 J9.1 J9.2 J9.3 J9.4 J10.1 J10.2 J10.3 J10.4 J11.1 J11.2 J11.3 J11.4 J12.1 J12.2 J12.3 J12.4 J13.1 J13.2 J13.3 J14.1 J14.2 J14.3 J15.1 J15.2 J16.1 J16.2 J16.3 J17.1 J17.2 J18.1 J18.2 J19.1 J19.2 J20.1 J20.2 J20.3 J21.1 J21.2 J21.3 J22.1 J22.2 J22.3 J23.1 J23.2 J23.3 J24.1 J24.2 J24.3 J25.1 J25.2 J25.3 J26.1 J26.2 J26.3 J27.1 J27.2 J27.3 J28.1 J28.2 J28.3 J29.1 J29.2 J30.1 J30.2 J31.1 J31.2 J32.1 J32.2 J33.1 J33.2 J34.1 J34.2 J34.3 J34.4 J34.5 J35.1 J35.2 J35.3 J35.4 J35.5 J36.1 J36.2 J36.3 J36.4 J36.5 J36.6 J37.1 J37.2 J37.3 J37.4 J37.5 JK1.1 JK1.2 JK1.3 JK1.4 JK1.5 JK2.1 JK2.2 JK2.3 JK2.4 JK2.5 K1.1 K1.2 K1.3 K1.4 K1.5 K1.6 K1.7 K1.8 K2.1 K2.2 K3.1 K3.2 LED1.1 LED1.2 LED2.1 LED2.2 LED3.1 LED3.2 LED4.1 LED4.2 LED5.1 LED5.2 LED6.1 LED6.2 LED7.1 LED7.2 LED8.1 LED8.2 LED9.1 LED9.2 LED10.1 LED10.2 M1.1 M1.2 M1.3 M1.4 M1.5 M1.6 M1.7 M1.8 M1.9 M1.10 M1.11 M1.12 M1.13 M1.14 M1.15 M1.16 M1.17 M1.18 M1.19 M1.20 M1.21 M1.22 M1.23 M1.24 M1.25 M1.26 M1.27 M1.28 M1.29 M1.30 M1.31 M1.32 M1.33 M1.34 M1.35 M1.36 M1.37 M1.38 M1.39 P1.1 P1.2 P1.3 P1.4 P1.5 P1.6 P1.7 P1.8 P2.1 P2.2 P2.3 P2.4 P2.5 P2.6 P2.7 P2.8 P3.1 P3.2 P3.3 P3.4 P3.5 P3.6 P3.7 P3.8 P4.1 P4.2 P4.3 P4.4 P4.5 P4.6 P5.1 P5.2 P5.3 P5.4 P5.5 P5.6 P5.7 P5.8 P6.1 P6.2 P6.3 P6.4 P6.5 P6.6 P7.1 P7.2 P7.3 P7.4 P7.5 P7.6 P7.7 P7.8 P8.1 P8.2 P8.3 P8.4 P8.5 P8.6 P8.7 P8.8 Q1.1 Q1.2 Q1.3 Q2.1 Q2.2 Q2.3 Q3.1 Q3.2 Q3.3 Q4.1 Q4.2 Q4.3 Q5.1 Q5.2 Q5.3 R1.1 R1.2 R2.1 R2.2 R3.1 R3.2 R4.1 R4.2 R5.1 R5.2 R6.1 R6.2 R7.1 R7.2 R8.1 R8.2 R9.1 R9.2 R10.1 R10.2 R11.1 R11.2 R12.1 R12.2 R13.1 R13.2 R14.1 R14.2 R15.1 R15.2 R16.1 R16.2 R17.1 R17.2 R18.1 R18.2 R19.1 R19.2 R20.1 R20.2 R21.1 R21.2 R22.1 R22.2 R23.1 R23.2 R24.8 R24.9 R25.1 R25.2 R26.8 R26.9 R27.3 R27.4 R28.3 R28.4 R29.3 R29.4 R30.3 R30.4 R31.1 R31.2 R32.3 R32.4 R33.1 R33.2 R34.3 R34.4 R35.1 R35.2 R36.8 R36.9 R37.8 R37.9 R38.3 R38.4 R39.3 R39.4 RP1.1 RP1.2 RP1.3 RP1.4 RP1.5 RP1.6 RP1.7 RP1.8 RP2.1 RP2.2 RP2.3 RP2.4 RP2.5 RP2.6 RP2.7 RP2.8 T1.1 T1.2 T1.3 T2.1 T2.2 T2.3 T3.1 T3.2 T3.3 T3.4 U1.1 U1.2 U1.3 U1.4 U1.5 U1.6 U1.7 U1.8 U1.9 U1.10 U1.11 U1.12 U1.13 U1.14 U1.15 U1.16 U2.1 U2.2 U2.3 U2.4 U2.5 U2.6 U2.7 U2.8 U2.9 U2.10 U2.11 U2.12 U2.13 U2.14 U2.15 U2.16 U3.1 U3.2 U3.3 U3.4 U4.1 U4.2 U4.3 U4.4 U4.5 U4.6 U4.7 U4.8 U5.1 U5.2 U5.3 U5.4 U5.5 U5.6 U5.7 U5.8 U6.1 U6.2 U6.3 U6.4 U6.5 U6.6 U6.7 U6.8 U6.9 U6.10 U6.11 U6.12 U6.13 U6.14 U6.15 U6.16 U6.17 U6.18 U6.19 U6.20 U6.21 U6.22 U6.23 U6.24 U6.25 U6.26 U6.27 U6.28 U6.29 U7.1 U7.2 U7.3 U7.4 U7.5 U7.6 U7.7 U7.8 U7.9 U8.1 U8.2 U8.3 U8.4 U8.5 U8.6 U8.7 U8.8 U8.9 U9.1 U9.2 U9.3 U9.4 U9.5 U9.6 U9.7 U9.8 U9.9 U9.10 U9.11 U9.12 U9.13 U9.14 U9.15 U9.16 U10.1 U10.2 U10.3 U10.4 U10.5 U10.6 U10.7 U10.8 U10.9 U10.10 U10.11 U10.12 U10.13 U10.14 U10.15 U10.16 U10.17 U10.18 U10.19 U10.20 U10.21 U10.22 U10.23 U10.24 U10.25 U11.1 U11.2 U11.3 U11.4 U11.5 U11.6 U11.7 U11.8 U11.9 U11.10 U11.11 U11.12 U11.13 U11.14 U11.15 U11.16